# Altium PCB figo_pcb_v4.PcbDoc (part 1 of 2)
Units mil, origin at the board's own origin, x right, y up, seen from the top; angles counter-clockwise.
Board outline 3996.06 x 2756.8 mil, 2 copper layers (Top, Bottom); 57 components, 52 nets, 210 pads, 169 vias.
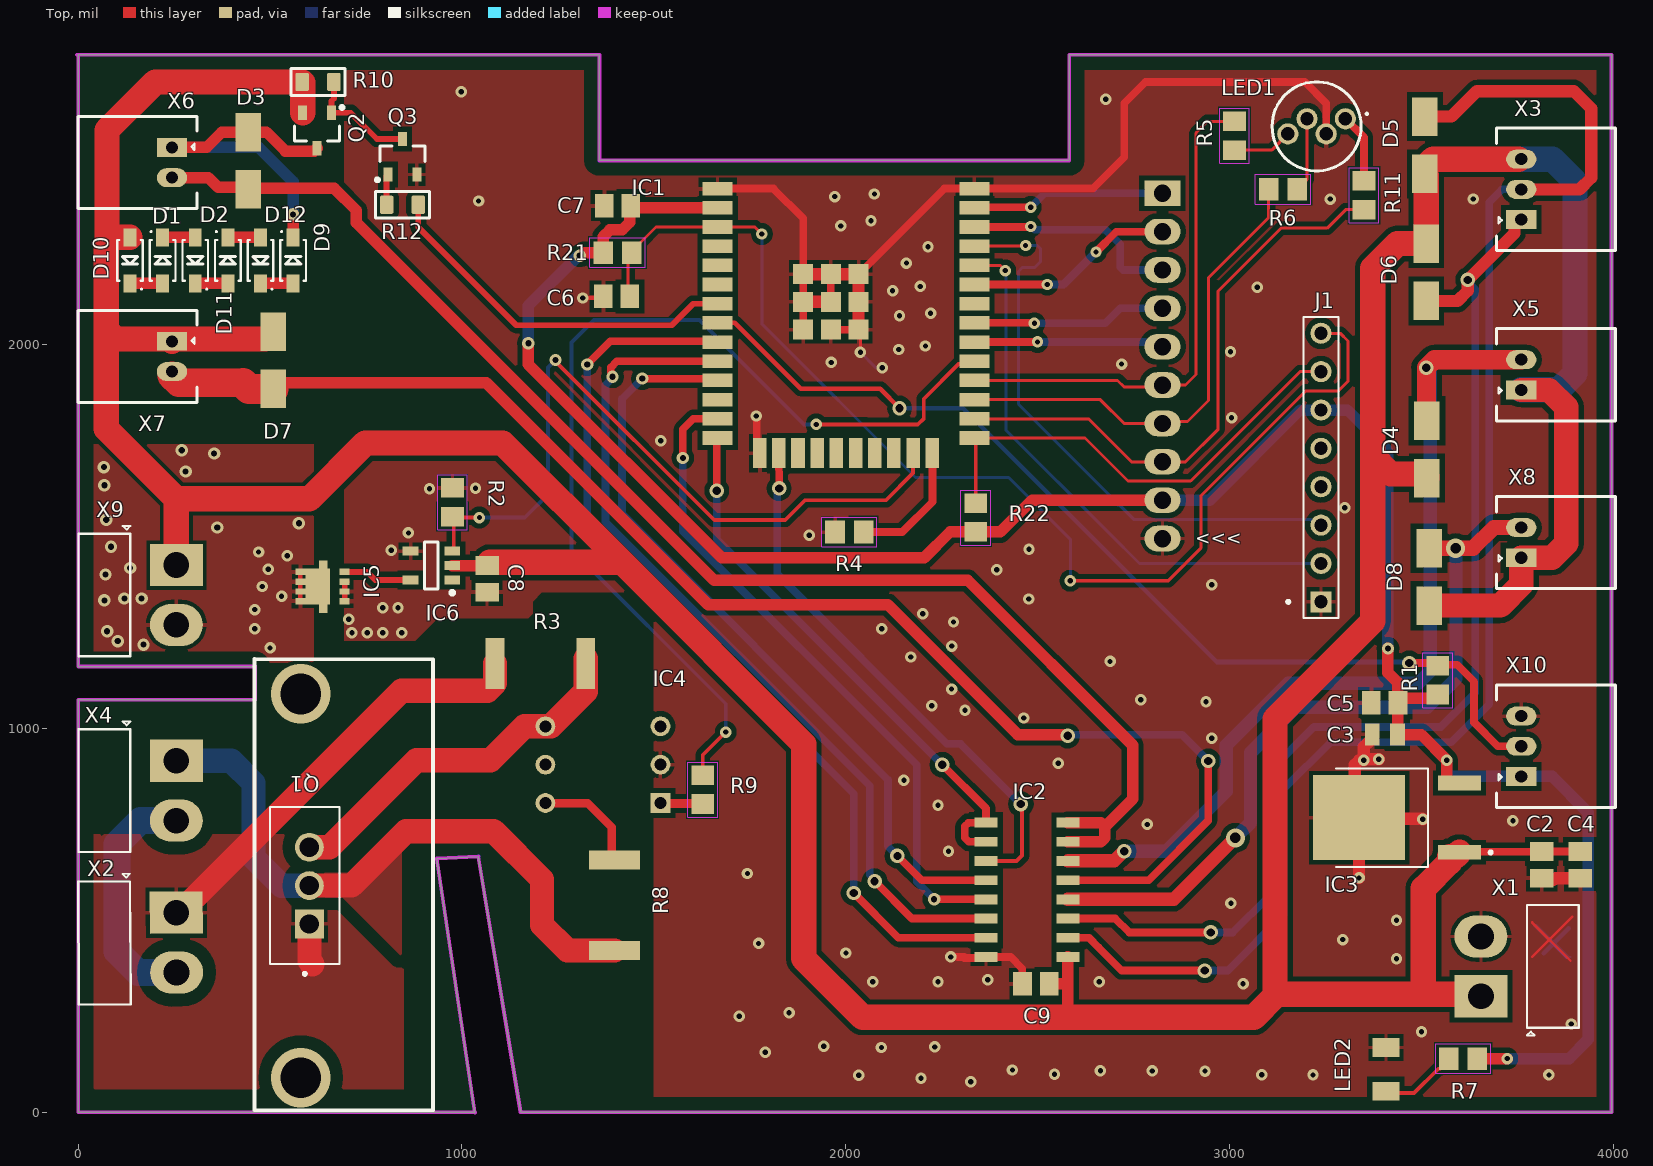
[diagram p0: Top view]
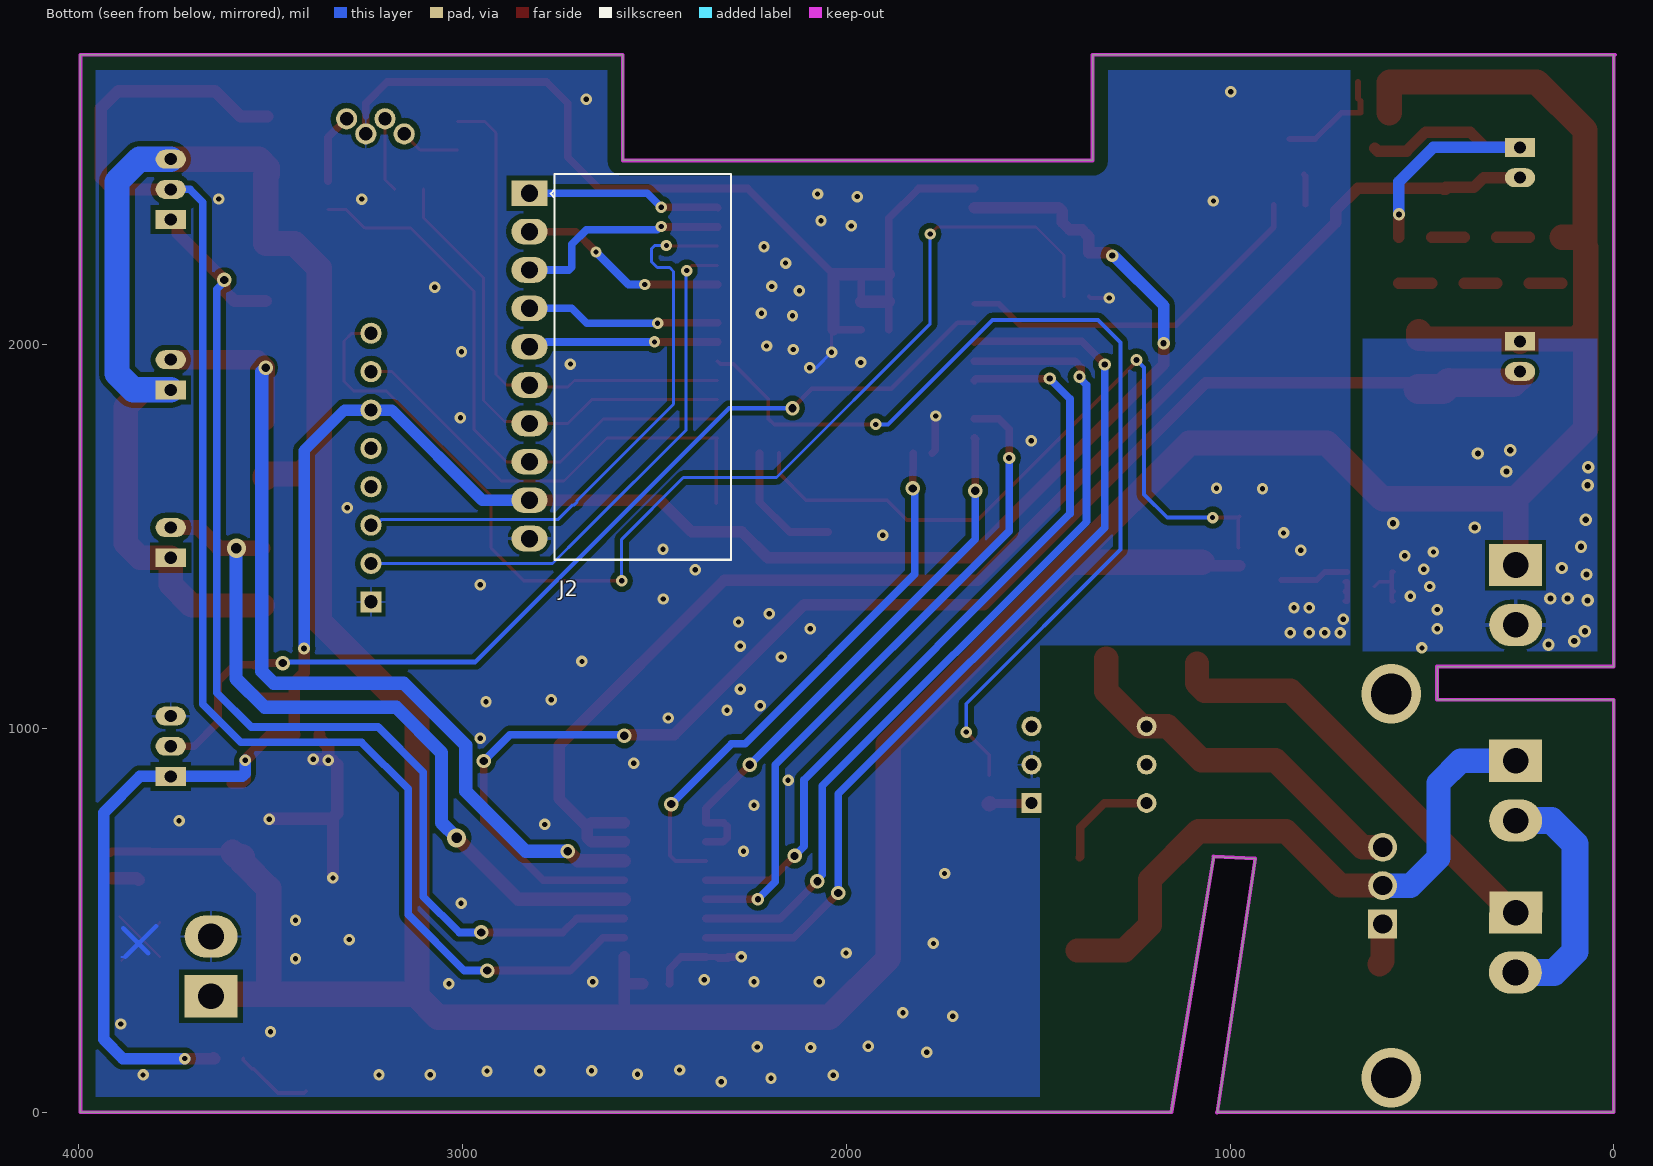
[diagram p1: Bottom view, seen from below]
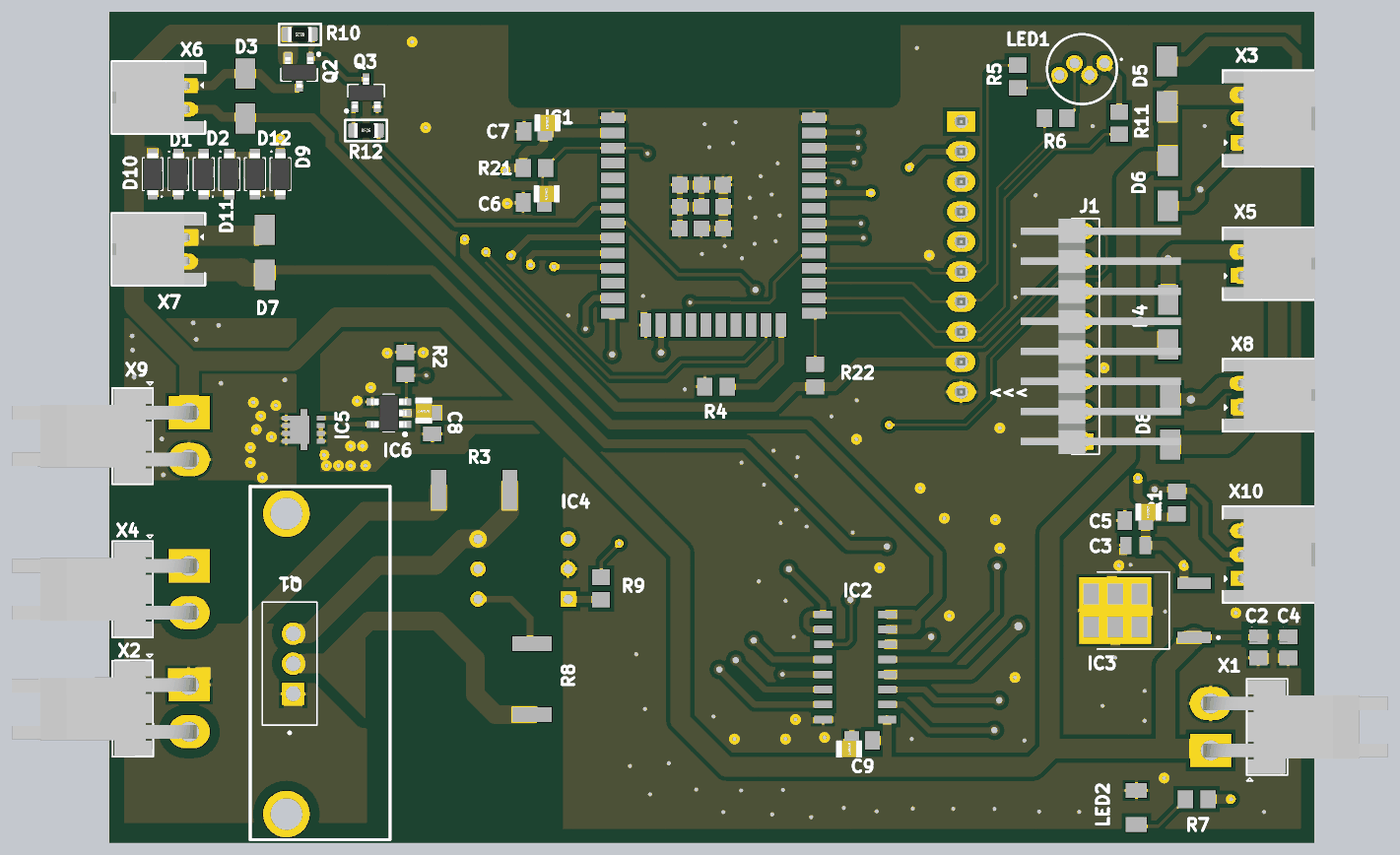
[diagram p2: 3D render of the assembled board from above, using the file's embedded part models]

## Layer stack, top to bottom
Top Solder: solder mask 0.4, Solder Resist, Dk 3.5
Top: signal copper 1.3778
Dielectric 1: dielectric 12.6, FR-4, Dk 4.8
Bottom: signal copper 1.3778
Bottom Solder: solder mask 0.4, Solder Resist, Dk 3.5

## Board outline
0,1074.8 460.63,1074.8 460.63,1161.42 0,1161.42 0,2755.91 1358.27,2755.91 1358.27,2480.31 2582.68,2480.31 2582.68,2755.91 3996.06,2755.91 3996.06,0 1153.54,0.01 1152.99,0.01 1042.81,666.25 934.58,660.93 1033.68,-0.89 1031.5,0 0,0

## Design rules (kind name [scope] priority, off if disabled: settings)
BoardOutlineClearance mdCopperDimension [All] p1: gap=10 ignorepadtopadclearanceinfootprint=FALSE except(0: Arc-SplitContinuation Track-SplitContinuation SMDPad-SplitContinuation THPad-SplitContinuation Via-SplitContinuation Fill-SplitContinuation Poly-SplitContinuation Region-SplitContinuation Text-SplitContinuation; 40: Poly-OutlineEdge Poly-CavityEdge Poly-CutoutEdge Poly-SplitBarrior)
Clearance Clearance_32 [InNamedPolygon('Top-NetQ1_1')] p1: gap=33 ignorepadtopadclearanceinfootprint=FALSE
Clearance Clearance_31 [InNamedPolygon('NETQ1_2_L01_P035')] p2: gap=10 ignorepadtopadclearanceinfootprint=FALSE except(0: Arc-Hole Track-Hole SMDPad-Hole THPad-Hole Via-Hole Fill-Hole Poly-Hole Region-Hole Text-Hole)
Clearance Clearance_30 [InNamedPolygon('Top-NetQ1_1')] p3: gap=22 ignorepadtopadclearanceinfootprint=FALSE
Clearance Clearance_29 [InNamedPolygon('Top-NetQ1_1')] p4: gap=25 ignorepadtopadclearanceinfootprint=FALSE
Clearance Clearance_28 [InNamedPolygon('Top-NetQ1_1')] p5: gap=10 ignorepadtopadclearanceinfootprint=FALSE except(0: Arc-Hole Track-Hole SMDPad-Hole THPad-Hole Via-Hole Fill-Hole Poly-Hole Region-Hole Text-Hole)
Clearance Clearance_27 [InNamedPolygon('Top-NetQ1_1')] p6: gap=10 ignorepadtopadclearanceinfootprint=FALSE except(0: Arc-Hole Track-Hole SMDPad-Hole THPad-Hole Via-Hole Fill-Hole Poly-Hole Region-Hole Text-Hole)
Clearance Clearance_26 [InNamedPolygon('NETQ1_2_L01_P021')] p7: gap=25 ignorepadtopadclearanceinfootprint=FALSE
Clearance Clearance_25 [InNamedPolygon('Bottom-NetQ1_1')] p8: gap=18 ignorepadtopadclearanceinfootprint=FALSE
Clearance Clearance_24 [InNamedPolygon('Bottom-NetQ1_1 1')] p9: gap=18 ignorepadtopadclearanceinfootprint=FALSE
Clearance Clearance_23 [InNamedPolygon('NETQ1_2_L01_P021')] p10: gap=18 ignorepadtopadclearanceinfootprint=FALSE
Clearance Clearance_22 [InNamedPolygon('Top-NetQ1_1')] p11: gap=18 ignorepadtopadclearanceinfootprint=FALSE
Clearance Clearance_21 [InNamedPolygon('Top-NetQ1_1')] p12: gap=590.55 ignorepadtopadclearanceinfootprint=FALSE
Clearance Clearance_20 [InNamedPolygon('NETQ1_1_L01_P023')] p13: gap=590.55 ignorepadtopadclearanceinfootprint=FALSE
Clearance Clearance_19 [InNamedPolygon('NETQ1_1_L01_P023')] p14: gap=10 ignorepadtopadclearanceinfootprint=FALSE except(0: Arc-Hole Track-Hole SMDPad-Hole THPad-Hole Via-Hole Fill-Hole Poly-Hole Region-Hole Text-Hole)
Clearance Clearance_18 [InNamedPolygon('Top-NetQ1_2')] p15: gap=25 ignorepadtopadclearanceinfootprint=FALSE
Clearance Clearance_17 [InNamedPolygon('Top-NetQ1_1')] p16: gap=25 ignorepadtopadclearanceinfootprint=FALSE
Clearance Clearance_16 [InNamedPolygon('Top-No Net')] p17: gap=10 ignorepadtopadclearanceinfootprint=FALSE except(0: Arc-Hole Track-Hole SMDPad-Hole THPad-Hole Via-Hole Fill-Hole Poly-Hole Region-Hole Text-Hole)
Clearance Clearance_15 [InNamedPolygon('Top-No Net')] p18: gap=10 ignorepadtopadclearanceinfootprint=FALSE except(0: Arc-Hole Track-Hole SMDPad-Hole THPad-Hole Via-Hole Fill-Hole Poly-Hole Region-Hole Text-Hole)
Clearance Clearance_14 [InNamedPolygon('Top-No Net')] p19: gap=30 ignorepadtopadclearanceinfootprint=FALSE
Clearance Clearance_13 [InNamedPolygon('Top-No Net')] p20: gap=25 ignorepadtopadclearanceinfootprint=FALSE
Clearance Clearance_12 [InNamedPolygon('Top-No Net')] p21: gap=25 ignorepadtopadclearanceinfootprint=FALSE
Clearance Clearance_11 [InNamedPolygon('Top-No Net')] p22: gap=25 ignorepadtopadclearanceinfootprint=FALSE
Clearance Clearance_10 [InNamedPolygon('Top-No Net')] p23: gap=10 ignorepadtopadclearanceinfootprint=FALSE except(0: Arc-Hole Track-Hole SMDPad-Hole THPad-Hole Via-Hole Fill-Hole Poly-Hole Region-Hole Text-Hole)
Clearance Clearance_9 [InNamedPolygon('Top-NetQ1_1')] p24: gap=10 ignorepadtopadclearanceinfootprint=FALSE except(0: Arc-Hole Track-Hole SMDPad-Hole THPad-Hole Via-Hole Fill-Hole Poly-Hole Region-Hole Text-Hole)
Clearance Clearance_8 [InNamedPolygon('Polygon_1_Net_GND')] p25: gap=14 ignorepadtopadclearanceinfootprint=FALSE
Clearance Clearance_7 [InNamedPolygon('Polygon_2_Net_GND')] p26: gap=14 ignorepadtopadclearanceinfootprint=FALSE
Clearance Clearance_6 [InNamedPolygon('Top-NetD2_2')] p27: gap=12 ignorepadtopadclearanceinfootprint=FALSE
Clearance Clearance_5 [InNamedPolygon('Top-NetQ1_2')] p28: gap=25 ignorepadtopadclearanceinfootprint=FALSE
Clearance Clearance_4 [InNamedPolygon('Top-NetQ1_2')] p29: gap=25 ignorepadtopadclearanceinfootprint=FALSE
Clearance Clearance_3 [InNamedPolygon('Top-NetQ1_1')] p30: gap=25 ignorepadtopadclearanceinfootprint=FALSE
Clearance Clearance_2 [InNamedPolygon('Top-NetQ1_1')] p31: gap=10 ignorepadtopadclearanceinfootprint=FALSE except(0: Arc-Hole Track-Hole SMDPad-Hole THPad-Hole Via-Hole Fill-Hole Poly-Hole Region-Hole Text-Hole)
Clearance Clearance_1 [InNamedPolygon('Top-NetQ1_1')] p32: gap=10 ignorepadtopadclearanceinfootprint=FALSE except(0: Arc-Hole Track-Hole SMDPad-Hole THPad-Hole Via-Hole Fill-Hole Poly-Hole Region-Hole Text-Hole)
Clearance "Clearance (Same Net)" [All] p33: gap=6 ignorepadtopadclearanceinfootprint=TRUE
Clearance [All] p34: gap=6 ignorepadtopadclearanceinfootprint=FALSE except(12: Arc-Poly Track-Poly SMDPad-Poly THPad-Poly Via-Poly Fill-Poly Poly-Poly Poly-Region Poly-Text; 40: Poly-Hole)
HoleSize [All] p1: absolutevalues=TRUE maxlimit=100000 minlimit=13.78 maxpercent=80.000 minpercent=20.000
HoleToHoleClearance mdDrill [All] p1: gap=6 allowstackedmicrovias=TRUE
PasteMaskExpansion mlMinCreamFrame [All] p1: expansion=0
PolygonConnect PolygonConnect_9 [All vs IsNamedPolygon('Bottom-NetQ1_1 1')] p1: connectstyle=Relief reliefconductorwidth=10 reliefentries=4 polygonreliefangle="90 Angle" airgapwidth=10
PolygonConnect PolygonConnect_8 [All vs IsNamedPolygon('Bottom-NetQ1_1')] p2: connectstyle=Relief reliefconductorwidth=10 reliefentries=4 polygonreliefangle="90 Angle" airgapwidth=10
PolygonConnect PolygonConnect_7 [All vs IsNamedPolygon('Top-NetQ1_1')] p3: connectstyle=Relief reliefconductorwidth=10 reliefentries=4 polygonreliefangle="90 Angle" airgapwidth=10
PolygonConnect PolygonConnect_6 [All vs IsNamedPolygon('Top-NetD2_2')] p4: thpad.connectstyle=Relief thpad.reliefconductorwidth=10 thpad.reliefentries=4 thpad.polygonreliefangle="90 Angle" thpad.airgapwidth=10 smdpad.connectstyle=Relief smdpad.reliefconductorwidth=10 smdpad.reliefentries=4 smdpad.polygonreliefangle="90 Angle" smdpad.airgapwidth=10 via.connectstyle=Direct via.reliefconductorwidth=10 via.reliefentries=4 via.polygonreliefangle="90 Angle" via.airgapwidth=10
PolygonConnect PolygonConnect_5 [All vs IsNamedPolygon('Top-NetQ1_2')] p5: thpad.connectstyle=Relief thpad.reliefconductorwidth=10 thpad.reliefentries=4 thpad.polygonreliefangle="90 Angle" thpad.airgapwidth=10 smdpad.connectstyle=Direct smdpad.reliefconductorwidth=10 smdpad.reliefentries=4 smdpad.polygonreliefangle="90 Angle" smdpad.airgapwidth=10 via.connectstyle=Direct via.reliefconductorwidth=10 via.reliefentries=4 via.polygonreliefangle="90 Angle" via.airgapwidth=10
PolygonConnect PolygonConnect_4 [All vs IsNamedPolygon('Top-NetQ1_2')] p6: thpad.connectstyle=Relief thpad.reliefconductorwidth=10 thpad.reliefentries=4 thpad.polygonreliefangle="90 Angle" thpad.airgapwidth=10 smdpad.connectstyle=Direct smdpad.reliefconductorwidth=10 smdpad.reliefentries=4 smdpad.polygonreliefangle="90 Angle" smdpad.airgapwidth=10 via.connectstyle=Relief via.reliefconductorwidth=10 via.reliefentries=4 via.polygonreliefangle="90 Angle" via.airgapwidth=10
PolygonConnect PolygonConnect_3 [All vs IsNamedPolygon('Top-NetQ1_2')] p7: thpad.connectstyle=Relief thpad.reliefconductorwidth=10 thpad.reliefentries=4 thpad.polygonreliefangle="90 Angle" thpad.airgapwidth=10 smdpad.connectstyle=Relief smdpad.reliefconductorwidth=10 smdpad.reliefentries=4 smdpad.polygonreliefangle="90 Angle" smdpad.airgapwidth=10 via.connectstyle=Direct via.reliefconductorwidth=10 via.reliefentries=4 via.polygonreliefangle="90 Angle" via.airgapwidth=10
PolygonConnect PolygonConnect_2 [All vs IsNamedPolygon('Top-NetQ1_2')] p8: thpad.connectstyle=Relief thpad.reliefconductorwidth=10 thpad.reliefentries=4 thpad.polygonreliefangle="90 Angle" thpad.airgapwidth=10 smdpad.connectstyle=Direct smdpad.reliefconductorwidth=10 smdpad.reliefentries=4 smdpad.polygonreliefangle="90 Angle" smdpad.airgapwidth=10 via.connectstyle=Direct via.reliefconductorwidth=10 via.reliefentries=4 via.polygonreliefangle="90 Angle" via.airgapwidth=10
PolygonConnect PolygonConnect_1 [All vs IsNamedPolygon('Top-NetD2_2')] p9: thpad.connectstyle=Relief thpad.reliefconductorwidth=10 thpad.reliefentries=4 thpad.polygonreliefangle="90 Angle" thpad.airgapwidth=10 smdpad.connectstyle=Direct smdpad.reliefconductorwidth=10 smdpad.reliefentries=4 smdpad.polygonreliefangle="90 Angle" smdpad.airgapwidth=10 via.connectstyle=Direct via.reliefconductorwidth=10 via.reliefentries=4 via.polygonreliefangle="90 Angle" via.airgapwidth=10
PolygonConnect PolygonConnect_For_PolygonThermal_ON_Width60000_Gap100000 [InPolygonClass('PolygonThermal_ON_Width60000_Gap100000') vs Not IsVia] p10: connectstyle=Relief reliefconductorwidth=6 reliefentries=4 polygonreliefangle="90 Angle" airgapwidth=10
PolygonConnect ThermalVias [IsVia] p11: connectstyle=Direct reliefconductorwidth=10 reliefentries=4 polygonreliefangle="90 Angle" airgapwidth=10
PolygonConnect [All] p12: connectstyle=Relief reliefconductorwidth=10 reliefentries=4 polygonreliefangle="90 Angle" airgapwidth=10
RoutingVias [All] p1: holewidth=13.78 width=29.78 viastyle="Through Hole" minholewidth=13.78 minwidth=29.78 maxholewidth=100 maxwidth=100
SolderMaskExpansion [All] p1: expansion=3 istentingtop=FALSE
SolderMaskExpansion mlMinStopFrame [All] p2: expansion=4 istentingtop=FALSE
Width [All] p1: maxlimit=10000 minlimit=6 preferedwidth=6
27 further rules are at their usual default settings.

## Classes and differential pairs
polygon class PolygonThermal_ON_Width60000_Gap100000: Polygon_1_Net_GND
polygon class Isolate_12: Polygon_1_Net_GND

## Components (designator, comment, footprint, x,y, rotation, side; value= is the part's Value field where it differs from the comment)
C2 "C0805C104K3RACAUTO" CAPC2012X88N 3814.11,644.75 r90 top
C3 "GRM21BR60J107ME15L" CAPC2012X145N 3405.51,984.25 r180 top
C4 "C0805C104K3RACAUTO" CAPC2012X88N 3914.11,644.75 r90 top
C5 "C0805C104K3RACAUTO" CAPC2012X88N 3404.92,1066.93 r0 top
C6 "C0805C104K3RACAUTO" CAPC2012X88N 1402.87,2125.98 r0 top
C7 "C0805C104K3RACAUTO" CAPC2012X88N 1405.51,2362.2 r0 top
C8 "C0805C104K3RACAUTO" CAPC2012X88N 1065.55,1389.69 r90 top
C9 "C0805C104K3RACAUTO" CAPC2012X88N 2495.75,335 r180 top
D1 "Diode" SOD-123F 220,2220 r90 top
D2 "Diode" SOD-123F 305,2220 r270 top
D3 "FM4004-W" DIONM5025X231N 443.36,2479.75 r270 top
D4 "FM4004-W" DIONM5025X231N 3514.62,1727.47 r90 top
D5 "FM4004-W" DIONM5025X231N 3509.6,2520.12 r90 top
D6 "FM4004-W" DIONM5025X231N 3513.28,2188.98 r270 top
D7 "FM4004-W" DIONM5025X231N 508.36,1959.75 r270 top
D8 "FM4004-W" DIONM5025X231N 3520.75,1395 r90 top
D9 "Diode" SOD-123F 560,2220 r90 top
D10 "Diode" SOD-123F 135,2220 r270 top
D11 "Diode" SOD-123F 390,2220 r90 top
D12 "Diode" SOD-123F 475,2220 r270 top
IC1 "ESP32-WROOM-32E(M113EH6400PH3Q0)" ESP32WROOM32D4MB 1666.29,2406.72 r0 top
IC2 "TBD62003AFWG,EL" SOIC127P600X175-16N 2472.62,579.64 r0 top
IC3 "UA78M33CKVURG3" TO229P990X252-3N 3437.01,767.72 r180 top
IC4 "MOC3083" DIP762W60P254L750H600Q6N 1367.52,905.75 r180 top
IC5 "NTTFS4939NTAG" DFN330X330X75-8N 636.77,1369.81 r180 top
IC6 "MCP1416T-E/OT" SOT23-5 920.55,1424.69 r180 top
J1 "102976-8" TE_102976-8 3238.87,1680.03 r90 top
J2 "HDR 1X10" "TH,POS-10S, R/A LOCK, 2.54mm" 2825.75,1945 r270 bottom locked
LED1 "WP154A4SUREQBFZGC" L-154A4SUREQBFZGEC 3227.42,2569.32 r90 top
LED2 "599-0210-007F" LEDC3216X90N 3408.17,111.76 r270 top
Q1 "‎BT138-600E,127‎" TO254P1040X460X1975-3 602.36,490.55 r90 top
Q2 "MOSFET-P_D" SOT23 622.4,2558.74 r270 top
Q3 "NPN" SOT23 845,2490 r90 top
R1 "ERJ-6RBD1652V" RESC2012X70 3543.31,1125.98 r90 top
R2 "ERJ-6RBD1652V" RESC2012X70 975.55,1589.69 r270 top
R3 "CRCW2512360RJNEG" RESC6332X70N 1204.72,1169.29 r0 top
R4 "ERJ-6RBD1652V" RESC2012X70 2009.58,1512.19 r180 top
R5 "ERJ-6RBD1652V" RESC2012X70 3013.4,2544.79 r90 top
R6 "ERJ-6RBD1652V" RESC2012X70 3139.82,2405.3 r180 top
R7 "ERJ-6RBD1652V" RESC2012X70 3609.11,139.75 r0 top
R8 "CRCW2512360RJNEG" RESC6332X70N 1397.64,539.37 r90 top
R9 "ERJ-6RBD1652V" RESC2012X70 1627.52,840.75 r90 top
R10 "" R0805 625,2685 r180 top
R11 "ERJ-6RBD1652V" RESC2012X70 3350.96,2389.67 r90 top
R12 "" R0805 845,2365 r0 top
R21 "ERJ-6RBD1652V" RESC2012X70 1405.51,2240.16 r180 top
R22 "ERJ-6RBD1652V" RESC2012X70 2339.11,1549.75 r270 top
X1 "8-1744056-2" "TE-ECOPWR-2S R/A, 3.96mm" 3655.75,380 r90 top
X2 "8-1744056-2" "TE-ECOPWR-2S R/A, 3.96mm" 255.91,442.05 r270.3 top
X3 "440055-3" "TE-HPI-3P TH R/A 2.0mm" 3760.75,2405 r90 top
X4 "8-1744056-2" "TE-ECOPWR-2S R/A, 3.96mm" 255.91,837.95 r270 top
X5 "440055-2" "TE-HPI-2P TH R/A 2.0mm" 3760.75,1921.88 r90 top
X6 "440055-2" "TE-HPI-2P TH R/A 2.0mm" 244.34,2475 r270 top
X7 "440055-2" "TE-HPI-2P TH R/A 2.0mm" 244.34,1969.75 r270 top
X8 "440055-2" "TE-HPI-2P TH R/A 2.0mm" 3760.75,1484.37 r90 top
X9 "8-1744056-2" "TE-ECOPWR-2S R/A, 3.96mm" 255.91,1347.95 r270 top
X10 "440055-3" "TE-HPI-3P TH R/A 2.0mm" 3760.75,953.74 r90 top

## Footprints (in the part's own frame and the unit in brackets; to place one, negate y for a bottom-side part, rotate by r counter-clockwise, add the part's x,y. Pads: shape width x height; smd on the part's side, far side on the other; paste and mask are expansions set on the pad)
CAPC2012X88N [mm]
  rect 1.24x1.56 smd: 1(-0.885,0) 2(0.885,0)
  body extent 0,0 2.2,1.45, height 1
CAPC2012X145N [mil] "CAPC2012X145N"
  rect 38.19x57.87 smd: 1(-32.68,0) 2(32.68,0)
DFN330X330X75-8N [mm]
  rect 0.66x0.42 smd: 1(-1.468,0.976) 2(-1.468,0.326) 3(-1.468,-0.324) 4(-1.468,-0.974) 5(1.469,-0.973) 6(1.469,-0.323) 7(1.469,0.327) 8(1.469,0.977)
  rect 1.64x2.37 smd: D(0.318,0.001)
  rect 0.57x3.46 smd: D.(-0.04,0.001)
DIONM5025X231N [mil] "DIONM5025X231N"
  rect 100.39x66.93 smd: 1(-74.8,0) 2(74.8,0)
DIP762W60P254L750H600Q6N [mil] "DIP762W60P254L750H600Q6N"
  rect 51.5x51.5 / inner rect 60x60 / far side rect 51.5x51.5 hole 31.5: 1(-150,100)
  round 51.5 / inner round 60 / far side round 51.5 hole 31.5: 2(-150,0) 3(-150,-100) 4(150,-100) 5(150,0) 6(150,100)
ESP32WROOM32D4MB [mm] "ESP32WROOM32D4MB"
  rect 2x0.9 smd: 1(0,0.01) 2(0,-1.26) 3(0,-2.53) 4(0,-3.8) 5(0,-5.07) 6(0,-6.34) 7(0,-7.61) 8(0,-8.88) 9(0,-10.15) 10(0,-11.42) 11(0,-12.69) 12(0,-13.96) 13(0,-15.23) 14(0,-16.5) 25(17,-16.5) 26(17,-15.23) 27(17,-13.96) 28(17,-12.69) 29(17,-11.42) 30(17,-10.15) 31(17,-8.88) 32(17,-7.61) 33(17,-6.34) 34(17,-5.07) 35(17,-3.8) 36(17,-2.53) 37(17,-1.26) 38(17,0.01)
  rect 0.9x2 smd: 15(2.785,-17.5) 16(4.055,-17.5) 17(5.325,-17.5) 18(6.595,-17.5) 19(7.865,-17.5) 20(9.135,-17.5) 21(10.405,-17.5) 22(11.675,-17.5) 23(12.945,-17.5) 24(14.215,-17.5)
  rect 1.33x1.33 smd: 39(5.665,-5.655) 40(5.665,-7.49) 41(5.665,-9.325) 42(7.5,-9.325) 43(9.335,-9.325) 44(9.335,-7.49) 45(9.335,-5.655) 46(7.5,-5.655) 47(7.5,-7.49)
L-154A4SUREQBFZGEC [mil] "L-154A4SUREQBFZGEC"
  round 55.12 / inner round 60 / far side round 55.12 hole 35: 1(19.69,-75) 2(-19.69,-25) 3(19.69,25) 4(-19.69,75)
  silkscreen extent -116,-132 116,116
LEDC3216X90N [mil] "LEDC3216X90N"
  rect 49.21x70.87 smd: 1(-57.09,0) 2(57.09,0)
R0805 [mm] "Chip Resistor, 2-Leads, Body 2.00x1.25mm, IPC High Density-RESC2012X08L"
  rrect25% 0.9x1.2 smd: 1(-1.05,0) 2(1.05,0)
  silkscreen extent -1.78,-0.89 1.78,0.89, body extent -1,-0.62 1,0.63, height 0.5
RESC2012X70 [mil] "RESC2012X70"
  rect 51.18x59.06 smd: 1(-37.4,0) 2(37.4,0)
  Top keep-out lines w2: -71.77,38.7 71.77,38.7 71.77,-38.7 -71.77,-38.7 -71.77,38.7
RESC6332X70N [mm] "RESC6332X70N"
  rect 1.25x3.35 smd: 1(-3,0) 2(3,0)
SOD-123F [mm] "SODFL, 2-Leads, Body 1.60x3.50mm, IPC Medium Density"
  rect 1.2x0.85 smd: 1(-1.525,0) 2(1.525,0)
  silkscreen extent -1.35,-0.85 1.95,0.85, body extent -1.75,-0.85 1.75,0.85, height 0.81
SOIC127P600X175-16N [mm] "SOIC127P600X175-16N"
  rect 1.525x0.65 smd: 1(-2.712,4.445) 2(-2.712,3.175) 3(-2.712,1.905) 4(-2.712,0.635) 5(-2.712,-0.635) 6(-2.712,-1.905) 7(-2.712,-3.175) 8(-2.712,-4.445) 9(2.712,-4.445) 10(2.712,-3.175) 11(2.712,-1.905) 12(2.712,-0.635) 13(2.712,0.635) 14(2.712,1.905) 15(2.712,3.175) 16(2.712,4.445)
SOT23 [mm] "SOT95P235X110-3N, 3-Leads, Body 2.90x2.35mm, Pitch 0.95mm, IPC Medium Density"
  rect 0.95x0.6 smd: 1(-1.175,0.95) 2(-1.175,-0.95) 3(1.175,0)
  silkscreen extent -1.62,-1.5 0.7,1.75, body extent -1.3,-1.5 1.3,1.5, height 1.1
SOT23-5 [mm] "5-Leads, Body 2.96x2.82mm, Pitch 0.95mm, IPC Medium Density, SOT95P282X145-5N"
  rect 1.05x0.6 smd mask+0.05: 1(-1.375,0.95) 2(-1.375,0) 3(-1.375,-0.95) 4(1.375,-0.95) 5(1.375,0.95)
  silkscreen extent -1.5,-1.55 0.45,1.92, body extent -1.5,-1.55 1.5,1.55, height 1.45
"TE-ECOPWR-2S R/A, 3.96mm" [mm] "2 Positions Header, 3.96mm Through Hole Right Angle, P/N: 8-1744056-2"
  rect 2.8x3.5 hole 1.7: 1(-1.98,0)
  oval 2.8x3.5 hole 1.7: 2(1.98,0)
  silkscreen extent -4.57,-6.48 4.06,-3.05, body extent -3.96,-14.95 3.96,0.62, height 8.77
"TE-HPI-2P TH R/A 2.0mm" [mm] "P/N: 440055-2, Housing P/N: 440129-2, 2-440129-2"
  rect 1.25x2 hole 0.8: 1(-1,0)
  oval 1.25x2 hole 0.8: 2(1,0)
  silkscreen extent -3.05,-6.22 3.05,1.65, body extent -3,-6.18 3,1.52, height 4.96
"TE-HPI-3P TH R/A 2.0mm" [mm] "P/N: 440055-3, Housing P/N: 440129-3, 2-440129-3"
  rect 1.25x2 hole 0.8: 1(-2,0)
  oval 1.25x2 hole 0.8: 2(0,0) 3(2,0)
  silkscreen extent -4.05,-6.22 4.06,1.65, body extent -4,-6.18 4,1.52, height 4.96
TE_102976-8 [mm]
  rect 1.398x1.398 hole 0.89: 1(-8.89,0)
  round 1.398 hole 0.89: 2(-6.35,0) 3(-3.81,0) 4(-1.27,0) 5(1.27,0) 6(3.81,0) 7(6.35,0) 8(8.89,0)
  silkscreen extent -9.96,-1.17 9.96,2.27, body extent -9.96,-8.08 9.96,5.46, height 1.17
"TH,POS-10S, R/A LOCK, 2.54mm" [mm] "10 Positions R/A Friction lock Header, 2.54mm Through Hole, P/N: LHA-10-TRB"
  rect 1.7x2.4 hole 1.15: 1(-11.43,0)
  oval 1.7x2.4 hole 1.15: 2(-8.89,0) 3(-6.35,0) 4(-3.81,0) 5(-1.27,0) 6(1.27,0) 7(3.81,0) 8(6.35,0) 9(8.89,0) 10(11.43,0)
  silkscreen extent -12.7,1.4 12.83,13.34, body extent -12.7,-0.32 12.7,13.25, height 5.81
TO229P990X252-3N [mm]
  rect 2.83x0.97 smd: 1(-4.14,2.29) 3(-4.14,-2.29)
  rect 6.1x5.63 smd paste-4: 4(2.51,0)
  silkscreen extent -6.3,-3.26 4.04,3.26
TO254P1040X460X1975-3 [mm]
  rect 1.91x1.91 hole 1.27: 1(0,0)
  round 1.91 hole 1.27: 2(2.54,0) 3(5.08,0)
  silkscreen extent -3.4,-2 7.74,2.6

## Part data
C2 C4 C5 C6 C7 C8 C9: "0.1ÂµF Â±10% 25V Ceramic Capacitor X7R 0805 (2012 Metric)", Package="0805 KEMET", Availability=Good, Check_prices=https://www.snapeda.com/parts/C0805C104K3RACAUTO/KEMET/view-part/1798222/?ref=eda, MF=KEMET, MP=C0805C104K3RACAUTO, Price=None, Purchase-URL=https://pricing.snapeda.com/search/part/C0805C104K3RACAUTO/?ref=eda, SnapEDA_Link=https://www.snapeda.com/parts/C0805C104K3RACAUTO/KEMET/view-part/1798222/?ref=snap
C3: "Multilayer Ceramic Capacitors MLCC - SMD/SMT 100UF   6.3V   20%        0805   Source:  Datasheet", MANUFACTURER_NAME="Murata Electronics", DeviceSetName=GRM21BR60J107ME15L, GateName_1=G$1, Height=1.45mm, LibraryName=GRM21BR60J107ME15L, Manufacturer_Part_Number=GRM21BR60J107ME15L, MOUSER_PART_NUMBER=81-GRM21BR60J107ME5L, MOUSER_PRICE-STOCK=https://www.mouser.co.uk/ProductDetail/Murata-Electronics/GRM21BR60J107ME15L?qs=qSv5qXjCIG0V4cgMTBuIkA%3D%3D, SymbolName_1=GRM21BR60J107ME15L
D1 D2 D9 D10 D11 D12: Forward Current=1A, Manufacturer="Pan Jit", Manufacturer Part Number=GS1001FL_R1_00001, Max Operating Temperature=150°C, Max Repetitive Reverse Voltage (Vrrm)=100V, Max Reverse Current=1uA, Min Operating Temperature=-50°C, Peak Non-Repetitive Surge Current=16.5A, Supplier Part Number 1=3757-GS1001FL_R1_00001CT-ND, Category="Rectifier Diodes", ComponentLink1Description=http://www.panjit.com/upload/product/18/GS1000FL_SERIES.pdf?src-supplier=Avnet, ComponentLink1URL=http://www.panjit.com/upload/product/18/GS1000FL_SERIES.pdf?src-supplier=Avnet, Mounting Technology="Surface Mount", Pricing 1="1=0.24, 10=0.199, 100=0.1057, 500=0.06952, 1000=0.04728 (USD)", RoHS=Yes, RoHS Compliant=Yes, Stock 1=10971, Supplier 1=Digi-Key
D3 D4 D5 D6 D7 D8: "Rectifiers 1N4004 1A 400V   Source:  Datasheet", MANUFACTURER_NAME=Rectron, DeviceSetName=FM4004-W, GateName_1=G$1, Height=2.31mm, LibraryName=FM4004-W, Manufacturer_Part_Number=FM4004-W, MOUSER_PART_NUMBER=583-FM4004, MOUSER_PRICE-STOCK=https://www.mouser.co.uk/ProductDetail/Rectron/FM4004-W?qs=Iw9Ubr57Px3IHNH1bE4l9w%3D%3D, SymbolName_1=FM4004-W
IC1: library part ESP32-WROOM-32D__4MB_, "WiFi Modules (802.11) SMD Module, ESP32-D0WD, 32Mbits SPI flash, UART mode, PCB antenna   Source:  Datasheet", MANUFACTURER_NAME="Espressif Systems", Manufacturer_Part_Number="ESP32-WROOM-32D (4MB)", DeviceSetName=ESP32-WROOM-32D__4MB_, GateName_1=G$1, Height=3.2mm, LibraryName=ESP32-WROOM-32D__4MB_, MOUSER_PART_NUMBER=356-ESP32WROOM-32D, MOUSER_PRICE-STOCK=https://www.mouser.co.uk/ProductDetail/Espressif-Systems/ESP32-WROOM-32D-4MB?qs=GBLSl2AkirvkALo4fyKM5Q%3D%3D, SymbolName_1=ESP32-WROOM-32D__4MB_
IC2: library part ULN2003ADR, "Trans Darlington NPN 50V 0.5A SOIC16 Texas Instruments ULN2003ADR, 7-element NPN Darlington Transistor Array, 0.5 A 50 V, 16-Pin SOIC   Source:  Datasheet", MANUFACTURER_NAME="Texas Instruments", DeviceSetName=ULN2003ADR, GateName_1=G$1, Height=1.75mm, LibraryName=ULN2003ADR, Manufacturer_Part_Number=ULN2003ADR, MOUSER_PART_NUMBER=595-ULN2003ADR, MOUSER_PRICE-STOCK=https://www.mouser.co.uk/ProductDetail/Texas-Instruments/ULN2003ADR?qs=D5pVkbrsqqI8WxXD0eSvDA%3D%3D, SymbolName_1=ULN2003ADR
IC3: Package=None, Availability=Unavailable, MP=UA78M33CKVURG3, Price=None
IC4: "Triac & SCR Output Optocouplers 800VDRM IFT=5mA 6 Pin Optocoupler   Source:  Datasheet", MANUFACTURER_NAME=Lite-On, DeviceSetName=MOC3083, GateName_1=G$1, Height=6mm, LibraryName=MOC3083, Manufacturer_Part_Number=MOC3083, MOUSER_PART_NUMBER=859-MOC3083, MOUSER_PRICE-STOCK=https://www.mouser.co.uk/ProductDetail/Lite-On/MOC3083?qs=2BArZ0I3Qlm%252BsCXQP3OOeA%3D%3D, SymbolName_1=MOC3083
IC5: "Power MOSFET 30V 56A 5.5 mOhm Single N-Channel u8FL", Package=None, Availability=Unavailable, MP=NTTFS4939NTAG, Price=None
IC6: "1.5A, High Speed Power MOSFET Driver Non Inverting", Manufacturer=Microchip, Max Operating Temperature=125°C, Min Operating Temperature=-40°C, Output Peak Current Limit-Nom=1.5A, Package Body Material=Plastic, Package Code=LSSOP, Package Equivalence Code=TSOP5/6,.11,37, Package Shape=Rectangular, Package Style="SMALL OUTLINEMeter", Peak Reflow Temperature (Cel)=260°C, Power Supplies=4.5/18V, Supplier Part Number 1=MCP1416T-E/OTCT-ND, Temperature Grade=AUTOMOTIVE, Time @ Peak Reflow Temperature-Max (s)=40s, Category="Gate Drivers", ComponentLink1Description=https://datasheet.ciiva.com:443/pdfs/VipMasterIC/IC/MCHP/MCHPS05696/MCHPS05696-1.pdf?src-supplier=IHS+Markit, ComponentLink1URL=https://datasheet.ciiva.com:443/pdfs/VipMasterIC/IC/MCHP/MCHPS05696/MCHPS05696-1.pdf?src-supplier=IHS+Markit, ComponentLink2Description=https://datasheet.ciiva.com/3228/22092d-mcp1415-3228496.pdf?src-supplier=Avnet, ComponentLink2URL=https://datasheet.ciiva.com/3228/22092d-mcp1415-3228496.pdf?src-supplier=Avnet, ComponentLink3Description=https://datasheet.ciiva.com/23952/1669445-23952041.pdf?src-supplier=Newark, ComponentLink3URL=https://datasheet.ciiva.com/23952/1669445-23952041.pdf?src-supplier=Newark, ComponentLink4Description=https://datasheet.ciiva.com/1500/1669445-1500307.pdf?src-supplier=Element14, ComponentLink4URL=https://datasheet.ciiva.com/1500/1669445-1500307.pdf?src-supplier=Element14, ComponentLink5Description=https://datasheet.ciiva.com/22694/1669445-22694330.pdf?src-supplier=Element14, ComponentLink5URL=https://datasheet.ciiva.com/22694/1669445-22694330.pdf?src-supplier=Element14, ComponentLink6Description=https://datasheet.ciiva.com/3226/22092d-mcp1415-3226504.pdf?src-supplier=Avnet, ComponentLink6URL=https://datasheet.ciiva.com/3226/22092d-mcp1415-3226504.pdf?src-supplier=Avnet, ComponentLink7Description=https://datasheet.ciiva.com/1954/22092e-1954917.pdf?src-supplier=Digi-Key, ComponentLink7URL=https://datasheet.ciiva.com/1954/22092e-1954917.pdf?src-supplier=Digi-Key, ComponentLink8Description=https://datasheet.ciiva.com/1954/22092e-1954918.pdf?src-supplier=Digi-Key, ComponentLink8URL=https://datasheet.ciiva.com/1954/22092e-1954918.pdf?src-supplier=Digi-Key, ComponentLink9Description=https://datasheet.ciiva.com/1954/22092e-1954916.pdf?src-supplier=Digi-Key, ComponentLink9URL=https://datasheet.ciiva.com/1954/22092e-1954916.pdf?src-supplier=Digi-Key, ComponentLink10Description=https://datasheet.ciiva.com/29305/651398-da-01-en-ic-mosfet-drv-mcp1416t-e-ot-sot-23-5-mcp-29305420.pdf?src-supplier=Conrad, ComponentLink10URL=https://datasheet.ciiva.com/29305/651398-da-01-en-ic-mosfet-drv-mcp1416t-e-ot-sot-23-5-mcp-29305420.pdf?src-supplier=Conrad, Height - Seated (Max)=1.45mm, High Side Driver=No, Interface IC Type="BUFFER OR INVERTER BASED MOSFET DRIVER", JESD-30 Code=R-PDSO-G5, JESD-609 Code=e3, Length=2.9mm, Manufacturer Part Number=MCP1416T-E/OT, Moisture Sensitivity Level=1, Number of Functions=1, Number of Pins=5, Pricing 1="1=0.80000, 25=0.69000 (USD)", Qualification Status="Not Qualified", REACH SVHC=Yes, RoHS=Yes, RoHS Compliant=Yes, Supplier 1=Digi-Key, Surface Mount=Yes, Technology=CMOS, Terminal Finish=Tin, Terminal Form="Gull Wing", Terminal Pitch=0.95mm, Terminal Position=DUAL, Turn-Off Delay Time=0.06us, Turn-On Delay Time=0.055us, Width=1.55mm
J1: "Conn Unshrouded Header HDR 8 POS 2.54mm Solder ST Thru-Hole Carton", Package=None, Availability=Warning, Centerline_Pitch="2.54 mm[.1 in]", Check_prices=https://www.snapeda.com/parts/102976-8/TE%20Connectivity%20AMP%20Connectors/view-part/1332152/?ref=eda, EU_RoHS_Compliance="Not Compliant", MF="TE Connectivity", MP=102976-8, Number_of_Positions=8, Price=None, Product_Type=Connector, SnapEDA_Link=https://www.snapeda.com/parts/102976-8/TE%20Connectivity%20AMP%20Connectors/view-part/1332152/?ref=snap
J2: "HEADER 1X10"
LED1: "Standard LEDs - Through Hole RGB 630/525/465nm 750/420/750mcd 60Deg   Source:  Datasheet", MANUFACTURER_NAME=Kingbright, DeviceSetName=WP154A4SUREQBFZGC, GateName_1=G$1, Height=mm, LibraryName=WP154A4SUREQBFZGC, Manufacturer_Part_Number=WP154A4SUREQBFZGC, MOUSER_PART_NUMBER=604-WP154A4SUREQBFZG, MOUSER_PRICE-STOCK=https://www.mouser.co.uk/ProductDetail/Kingbright/WP154A4SUREQBFZGC?qs=vEWui5pQpauEeiZ%252Btq6oqQ%3D%3D, SymbolName_1=WP154A4SUREQBFZGC
LED2: "Standard LEDs - SMD SMD 1206 RED   Source:  Datasheet", MANUFACTURER_NAME=Dialight, DeviceSetName=599-0210-007F, GateName_1=G$1, Height=0.9mm, LibraryName=599-0210-007F, Manufacturer_Part_Number=599-0210-007F, MOUSER_PART_NUMBER=645-599-0210-007F, MOUSER_PRICE-STOCK=https://www.mouser.co.uk/ProductDetail/Dialight/599-0210-007F?qs=gTYE2QTfZfRnv7f5dCtvhw%3D%3D, SymbolName_1=599-0210-007F
Q1: library part BTA06-600BRG, "TRIAC Standard 600V 6A Through Hole TO-220AB", Package="TO-220 STMicroelectronics", Availability=Unavailable, MF=STMicroelectronics, MP=BTA06-600BRG, Price=None, SnapEDA_Link=https://www.snapeda.com/parts/BTA06-600BRG/STMicroelectronics/view-part/107180/?ref=snap
Q2: "30V P-channel Enhancement Mode Mosfet", Manufacturer="Pan Jit", Manufacturer Part Number=PJA3409_R1_00001, Supplier Part Number 1=3757-PJA3409_R1_00001CT-ND, Category=Uncategorized, ComponentLink1Description="Manufacturer Link", ComponentLink1URL=http://www.irf.com/, DatasheetVersion=PD-9.390D, LatestRevisionDate=17-Jul-2002, LatestRevisionNote="Re-released for DXP Platform.", Note="Pin 4 not drawn and electrically connected to Pin 2.", PackageDescription="TO, Thru-Hole, Vertical, Heatsink Mounted; 3 In-Line Leads; Pitch 2.54 mm", PackageReference=TO-220AB, PackageVersion=Feb-1997, Pricing 1="1=0.49000, 10=0.36300, 100=0.20550, 500=0.13608, 1000=0.10433 (USD)", Published=8-Jun-2000, Publisher="Altium Limited", RoHS=No, Stock 1=107416, Supplier 1=Digi-Key
Q3: "NPN Ic=600mA Vceo=40V hfe=100~300 fT=300MHz P=310mW SOT-23", Case/Package=SOT-23, Clock Frequency=300MHz, Collector Base Voltage (VCBO)=75V, Collector Emitter Breakdown Voltage=40V, Collector Emitter Saturation Voltage=1V, Continuous Collector Current=600mA, Current=1A, Emitter Base Voltage (VEBO)=6V, Manufacturer=Diodes, Manufacturer Part Number=MMBT2222A-7-F, Max Operating Temperature=150°C, Max Power Dissipation=300mW, Min Operating Temperature=-55°C, Package Quantity=3000, Power Dissipation=350mW, Supplier Part Number 1=MMBT2222A-FDICT-ND, Category=BJTs, Collector Emitter Voltage (VCEO)=40V, Collector-emitter Voltage-Max=1V, ComponentLink1Description=https://datasheet.ciiva.com/8029/ds30041-8029709.pdf?src-supplier=Element14, ComponentLink1URL=https://datasheet.ciiva.com/8029/ds30041-8029709.pdf?src-supplier=Element14, ComponentLink2Description=https://datasheet.ciiva.com/11201/ds30041-11201864.pdf?src-supplier=Avnet, ComponentLink2URL=https://datasheet.ciiva.com/11201/ds30041-11201864.pdf?src-supplier=Avnet, ComponentLink3Description=https://datasheet.ciiva.com/16199/ds30041-16199045.pdf?src-supplier=Future+Electronics, ComponentLink3URL=https://datasheet.ciiva.com/16199/ds30041-16199045.pdf?src-supplier=Future+Electronics, Contact Plating=Tin,Matte, Current Rating=600mA, Designer=Roomi, Designer Email=roomi.freel@gmail.com, Element Configuration=Single, Frequency=300MHz, Gain Bandwidth Product=300MHz, Height=1mm, hFE Min=100, Lead Free="Lead Free", Length=3.05mm, Max Breakdown Voltage=40V, Max Collector Current=600mA, Mounting Technology="Surface Mount", Number of Elements=1, Packaging="Tape and Reel", Pins=3, Polarity=NPN, Pricing 1="1=0.14000, 10=0.13200, 100=0.07200, 500=0.04430, 1000=0.03021 (USD)", Radiation Hardening=No, Reach SVHC Compliant=Yes, RoHS=Yes, RoHS Compliant=Yes, Series="Automotive, AEC-Q101", Stock 1=2753666, Supplier 1=Digi-Key, Supplier 2=Mouser, Supplier Part Number 2=621-MMBT2222A-F, Termination=SMD/SMT, Transition Frequency=300MHz, Val=NPN, Voltage=40V, Voltage Rating (DC)=40V, Weight=0.000282oz, Width=1.4mm
R1 R2 R4 R5 R6 R7 R9 R11 R21 R22: Package="0805 Panasonic", Availability=Unavailable, DeviceSetName=ERJ-6RBD1652V, GateName_1=G$1, LibraryName=ERJ-6RBD1652V, MF=Panasonic, MP=ERJ-6RBD1652V, Price=None, SymbolName_1=ERJ-6RBD1652V
R3 R8: "VISHAY - CRCW2512360RJNEG - RES, THICK FILM, 360R, 5%, 0.5W, 2512   Source:  Datasheet", MANUFACTURER_NAME=Vishay, DeviceSetName=CRCW2512360RJNEG, GateName_1=G$1, Height=0.7mm, LibraryName=CRCW2512360RJNEG, Manufacturer_Part_Number=CRCW2512360RJNEG, MOUSER_PART_NUMBER=71-CRCW2512J-360-E3, MOUSER_PRICE-STOCK=https://www.mouser.com/Search/Refine.aspx?Keyword=71-CRCW2512J-360-E3, SymbolName_1=CRCW2512360RJNEG
R10 R12: library part Resistor, "General Purpose Chip Resistor", Designer=Roomi, Designer Email=roomi.freel@gmail.com
  R10: Val=47k
  R12: Val=2.2k
X1 X2 X4 X5 X6 X7 X8 X9: library part "HDR 1X2", "HEADER 1X2"
X3 X10: library part "HDR 1X3", "HEADER 1X3"

## Via types
v1: diameter 29.78/29.78 (per signal layer), hole 13.78, Top to Bottom, 76 vias
v2: diameter 29.78, hole 13.78, Top to Bottom, 46 vias
v3: diameter 32, hole 16, Top to Bottom, tented both sides, 19 vias
v4: diameter 37.65/37.65 (per signal layer), hole 21.65, Top to Bottom, 16 vias
v5: diameter 32, hole 16, Top to Bottom, 8 vias
v6: diameter 155, hole 106, Top to Bottom, 2 vias
v7: diameter 50, hole 28, Top to Bottom, tented both sides, 2 vias

## Nets (pads, with @x,y where several pads share a name; then routed paths per layer and width w, separated by ;. In a path a pad name is that pad's centre, name@x,y a point inside that pad or via, vN(x,y) a via of type N, cw(c..) or ccw(c..) an arc to the next point about the centre after c; other vN are vias at no path point)
FAN_SPD: IC1.7 R12.2 | length 967.3
  Top w15: R12.2 886.34,2306.57 1141.73,2051.18 1546.93,2051.18 1602.86,2107.11 IC1.7
GND: C2.1 C3.2 C4.1 C5.1 C6.1 C7.1 C8.1 C9.2 IC1.1 IC1.15 IC1.38 IC1.39 IC1.40 IC1.41 IC1.42 IC1.43 IC1.44 IC1.45 IC1.46 IC1.47 IC2.8 IC3.4 IC4.2 IC5.1 IC5.2 IC5.3 IC6.4 J1.1 J2.10 LED1.2 LED2.1 Q3.2 R2.1 R4.2 X1.2 X10.3 | length 4783.1
  Top w6: 3789.11,404.75 3894.11,509.75 3834.11,449.75 3889.11,394.75 3789.11,494.75
  Top w8: IC1.43 2038.56,2034.85 v1(2038.56,1980.26)
  Top w10: v2(1314.96,2122.05) 1364.09,2122.05 C6.1
  Top w15: IC5.1@699.3,1331.37 IC5.1 IC5.2 ; IC5.2@699.3,1356.96 IC5.2 ; IC5.3@699.3,1382.55 IC5.3 IC5.2
  Top w16: 2309.22,404.64 2333.29,404.64 IC2.8 2424,404.64
  Top w20: IC1.1 1811.82,2407.12 1889.33,2329.61 IC1.39 IC1.40 IC1.41 ; v1(1766.75,1814.47) 1768.62,1812.6 1768.62,1725.06 IC1.15 ; IC1.42 IC1.43 ; IC1.47 IC1.46 ; IC1.45 2256.85,2407.12 2644.35,2407.12 2725.75,2488.52 2725.75,2629.11 2781.63,2685 3196.77,2685 3252.85,2628.92 3252.85,2550.07 LED1.2 ; v2(2274.11,404.75) 2274.26,404.91 2291.94,404.91 2292.21,404.64 2309.22,404.64 ; 2309.22,401.85 2333.29,401.85 ; IC2.8 2424,404.64 2430,404.64 2460.55,374.09 2460.55,335.35 C9.2
  Top w32: IC1.40 IC1.47 ; IC1.39 IC1.46 IC1.45 IC1.44 IC1.43 ; v1(3338.19,610.63) IC3.4 3326.77,779.13 3326.77,905.51 3338.58,917.32 v2(3350.39,917.32) 3350.39,951.97 3372.83,974.41 C3.2 ; IC3.4@3346.46,764.75 3390.29,764.75 3502.96,764.75 v1(3503.94,763.78) ; v2@3352.83,919.75 v1(3389.11,919.75) ; C2.1@3844.15,604.95 3849.11,609.91 C4.1
  Bottom w6: 3879.11,404.75 3889.11,404.75
  Bottom w8: v1(2038.56,1980.26) 2078.82,1940 v1(2095.75,1940)
  Bottom w12: 3799.11,484.75 3879.11,404.75 3844.11,439.75 3884.11,479.75 3819.11,414.75
  other v1: 2326.08,79.47 2196.43,88.84 2033.95,96.68 3217.97,97.19 3832.97,97.19 3084.66,97.9 2544.31,99.08 2664.03,108.18 2799.07,107.55 2936.55,107.27 2434.74,110.1 1790.21,156.05 2093.32,168.57 2232.34,170.1 1943.32,171.68 3890.75,230 1723.05,249.83 1852.69,259.2 3035.75,335 2660.75,340 3435.75,400 2000.75,415 1773.05,439.83 3295.75,450 3435.75,500 1744.09,622.05 2268.05,679.83 2240.75,800 2152.01,864.83 2464.35,1027.35 2311.02,1047.24 2224.41,1059.06 2276.2,1102.86 2169.46,1186.44 2276.79,1214.91 2094.49,1259.84 2281.12,1277.58 2200.79,1299.21 2393.7,1413.39 2477.97,1467.19 1905.51,1503.94 1518.05,1749.83 3005.75,1810 1962.57,1954.08 3002.97,1982.19 2138.13,1987.82 2207.93,1996.84 2140.37,2075.62 2221.43,2082.39 2122.38,2140.93 3073.05,2149.83 2194.39,2152.19 2158.4,2212.98 2214.66,2255.73 1987.34,2309.75 2066.12,2323.25 3263.05,2379.83 3635.75,2380 1971.55,2386.32 2075.09,2393.06 2678.05,2639.83
  other v2: 3500.75,210 2070.75,340 2240.75,340 2370.75,345 3004.11,544.75 2785.75,750 3739.11,759.75 2554.11,909.75 2954.11,974.75 2939.11,1069.75 2769.11,1074.75 2689.11,1174.75 713.36,1249.75 753.36,1249.75 793.36,1249.75 843.36,1249.75 705,1285 793.36,1314.75 833.36,1314.75 2476.94,1337.59 2954.11,1374.75 815.55,1464.69 860.55,1509.69 3300.75,1575 915.55,1624.69 1035.43,1625.98 2719.11,1949.75 1043.36,2374.75 998.36,2659.75
IO4: IC1.26 J2.8 R11.1 | length 1544.9
  Top w8: IC1.26 2632.87,1807.12 2745,1695 J2.8 2885.75,1695 2970.75,1780 2970.75,2140 3134.83,2304.08 3254.83,2304.08 3303.02,2352.27 R11.1
IO16: IC1.27 J2.7 R6.2 | length 1275.9
  Top w8: IC1.27 2534.27,1857.12 2663.62,1857.13 2725.75,1795 J2.7 2830.75,1800 2890.75,1800 2945.75,1855 2945.75,2175 3102.42,2331.67 R6.2
IO17: IC1.28 J2.6 R5.2 | length 1340.7
  Top w8: IC1.28 2708.63,1907.11 2725.75,1890 2820.75,1890 J2.6 2885.75,1895 2913.21,1922.46 2913.21,2552.46 2942.94,2582.19 R5.2
IO18: IC1.30 J2.5 | length 495.5
  Top w20: IC1.30 2499.67,2007.12 v1(2500.02,2007.47)
  Bottom w20: v1(2500.02,2007.47) 2780.89,2007.47 2784.38,2003.98 2816.77,2003.98 J2.5
IO19: IC1.31 J2.4 | length 506.8
  Top w20: IC1.31 2490.92,2057.12 v1(2492.06,2055.97)
  Bottom w20: v1(2492.06,2055.97) 2676.72,2055.97 2715.75,2095 J2.4
IO21: IC1.33 J2.2 | length 547.3
  Top w20: IC1.33 v2(2525.75,2157.11) ; v2(2652.59,2241.84) 2705.75,2295 J2.2
  Bottom w20: v2(2525.75,2157.11) 2567.86,2157.11 v2(2652.59,2241.84)
IO22: IC1.36 J2.3 | length 572
  Top w20: IC1.36 2481.36,2307.12 v1(2482.46,2308.21)
  Bottom w20: v1(2482.46,2308.21) 2485.1,2308.21 2493.32,2300 2677.27,2300 2715.75,2261.53 2715.75,2202.62 2723.36,2195 J2.3
IO23: IC1.37 J2.1 | length 505.8
  Top w20: IC1.37 2337.12,2358.65 v1(2482.46,2358.65)
  Bottom w20: v1(2482.46,2358.65) 2518.8,2395 J2.1
NetC2_2: C2.2 C4.2 C8.2 C9.1 D4.1 D5.1 D6.1 D7.1 D8.1 D10.1 IC2.9 IC3.1 IC6.2 Q2.2 R10.2 X1.1 X3.3 X5.1 X7.1 X8.1 X9.1 | length 12687.9
  Top w20: IC3.1 3601.02,678.58 3813.09,678.58 C2.2 C4.2 ; C4.2@3918.95,674.75 C4.2@3919.11,674.91
  Top w30: IC6.2 C8.2@1055.61,1424.69 ; C9.1 2579.39,335 ; 2579.39,247.47 2579.39,335 ; IC2.9 2579.39,335
  Top w63: D8.1 3705.95,1320.2 3760.75,1375 X8.1 3840.75,1445 3877.95,1482.2 3877.95,1837.8 3833.24,1882.51 X5.1
  Top w66: 73.36,1944.75 73.36,1780.97 255.91,1598.43 ; 73.36,1947.59 73.36,2038.67 ; 100.04,2280.04 D10.1 ; X9.1 255.91,1598.43 ; D7.1 508.36,2017.82 507.89,2017.36 489.17,2017.36 486.81,2015 250.22,2015 X7.1 238.47,2015 97.03,2015 73.36,2038.67 ; Q2.2 585,2683.66 R10.2 200.75,2685 75,2559.25 75,2280.04 75,2255 73.36,2253.36 73.36,2038.67 ; C8.2@1072.18,1433.07 1413.39,1433.07 ; D5.1@3509.6,2450.24 D5.1 3513.28,2441.64 D6.1 3438.14,2263.78 3374.11,2199.75 3374.11,1709.62 ; D5.1@3509.6,2462.05 3531.28,2483.74 X3.3@3754.38,2483.74 ; D4.1 3514.62,1657.59 3508.71,1663.5 3420.23,1663.5 3374.11,1709.62 ; IC3.1 3589.09,666.65 3574.29,666.65 3574.29,651.85 3505.75,583.31 3505.75,307.59 ; X1.1@3644.11,307.59 3505.75,307.59 ; 255.91,1598.43 602.36,1598.43 748.03,1744.09 1106.3,1744.09 1415.35,1435.04 1890.75,959.65 1890.75,401.14 2044.42,247.47 2579.39,247.47 3063.99,247.47 3119.11,302.59 ; 3119.11,302.59 3124.11,307.59 3505.75,307.59 ; 3119.11,302.59 3119.11,1024.62 3374.11,1279.62 3374.11,1709.62
  Bottom w66: X5.1 3858.25,1882.51 3900.75,1925 3900.75,2425 3842.01,2483.74 X3.3
NetC6_2: C6.2 IC1.3 J1.8 R21.1 | length 3078.1
  Top w8: C6.2@1433.07,2124.2 1433.07,2234.26 1505.93,2307.11 IC1.3 1763.32,2307.12 v1(1781.75,2288.69) ; v2(2585.75,1385) 2840.75,1385 2925.75,1470 2925.75,1605 2925.05,1605.7 3199.11,1879.75 3284.11,1879.75 3309.11,1904.75 3309.11,2009.75 3289.11,2029.75 3239.15,2029.75 J1.8
  Bottom w8: v1(1781.75,2288.69) 1781.75,2054.63 2182.33,1654.06 2424.81,1654.06 2585.75,1493.11 v2(2585.75,1385)
NetD1_1: D1.1 D10.2 | length 85
  Top w30: D10.2 D1.1
NetD1_2: D1.2 D2.1 | length 85
  Top w30: D1.2 D2.1
NetD2_2: D2.2 D11.1 | length 85
  Top w30: D2.2 D11.1
NetD3_1: D3.1 D9.2 Q2.3 X6.1 | length 916.3
  Top w30: X6.1 334.37,2514.37 374.55,2554.55 D3.1 490.45,2554.55 540,2505 614.92,2505 618.7,2508.78 619.21,2508.78 622.4,2511.97 Q2.3 ; D9.2 v5(560,2340)
  Bottom w30: X6.1 470.63,2514.37 560,2425 v5(560,2340)
NetD3_2: D3.2 IC2.15 IC2.16 X6.2 | length 3612.8
  Top w30: X6.2 339.37,2435.63 365,2410 438.31,2410 440.84,2407.48 667.52,2407.48 725,2350 725,2318.31 1657.48,1385.83 2318.9,1385.83 2748.03,956.69 2748.03,816.38 2675.75,744.1 ; D3.2@438.31,2404.95 D3.2 ; IC2.15 2665.2,704.64 2675.75,715.19 2675.75,744.1 ; IC2.16 2665.2,754.64 2675.75,744.1
NetD4_2: D4.2 IC2.14 X5.2 | length 2407.4
  Top w35: IC2.14 2579.74,655 2700.03,655 2725.03,680 v4(2725.75,680)
  Top w50: v4(3513.52,1940.1) 3534.66,1961.25 X5.2 ; v4@3514.11,1939.75 3514.11,1802.78 D4.2
  Bottom w35: v4@2726.47,680 2835.75,680 2992.13,836.38 2992.13,956.69 3153.54,1118.11 3492.13,1118.11 3523.62,1149.61 3523.62,1929.28 3513.52,1939.39 v4(3513.52,1940.1)
NetD5_2: D5.2 IC2.10 X3.2 | length 3873.1
  Top w20: IC2.10 2634.21,454.64 2658.83,430.03 2719.7,369.16 v4(2936,369.16)
  Top w32: D5.2 3579.18,2594.92 3645.39,2661.13 3897.73,2661.13 3943.13,2615.73 3943.13,2435.54 3912.57,2405 X3.2
  Bottom w20: v4(2936,369.16) 2995.53,369.16 3141.73,515.37 3141.73,842.52 3263.78,964.57 3578.74,964.57 3677.17,1062.99 3677.17,2371.42 3710.75,2405 X3.2
NetD6_2: D6.2 IC2.11 X3.1 | length 2976.2
  Top w20: IC2.11 2703,504.64 2739.11,468.53 v4(2951.91,468.53)
  Top w32: D6.2 3594.49,2114.17 3621.23,2140.91 v4(3621.23,2169.06) 3742.95,2290.78 3742.95,2317.65 3751.55,2326.26 X3.1
  Bottom w20: v4(2951.91,468.53) 3009.03,468.53 3102.36,561.87 3102.36,885.83 3220.47,1003.94 3551.18,1003.94 3640.75,1093.5 3640.75,2144.77 3621.23,2164.29 v4(3621.23,2169.06)
NetD7_2: D7.2 IC2.13 X7.2 | length 3711.2
  Top w20: IC2.13 2789.67,604.64 2945.25,760.22 v4(2945.25,915.3)
  Top w30: D7.2@508.36,1900.85 1063.71,1900.85 1641.73,1322.83 2110.24,1322.83 2449.19,983.88 2570.32,983.88 2571.76,982.44 2577.17,982.44 v4(2578.64,980.97)
  Top w75: X7.2@244.34,1919.36 262.85,1900.85 428.99,1900.85
  Top w78.4: 428.99,1900.85 444.89,1884.95 D7.2
  Bottom w20: v4(2578.64,980.97) 2581.55,983.88 2876.67,983.88 v4(2945.25,915.3)
NetD8_2: D8.2 IC2.12 X8.2 | length 1959.4
  Top w35: IC2.12 2855.39,554.64 v7(3015.75,715)
  Top w40: D8.2 3635.55,1469.8 3689.49,1523.74 X8.2
  Bottom w35: v7(3015.75,715) 3055.12,754.37 3055.12,937.01 3173.23,1055.12 3515.75,1055.12 3590.75,1130.12 3590.75,1469 v7(3589.75,1470)
NetD9_1: D9.1 D12.2 | length 85
  Top w30: D12.2 D9.1
NetD11_2: D11.2 D12.1 | length 85
  Top w30: D11.2 D12.1
NetIC1_8: IC1.8 R1.2 X10.2 | length 2613.8
  Top w12: IC1.8 1711.31,2057.12 1883.32,1885.1 2090.21,1885.1 v4(2140.45,1834.87)
  Top w20: v4(3468.98,1170.59) 3536.1,1170.59 R1.2 ; R1.2@3534.96,1166.02 3593.82,1166.02 3637.8,1122.05 3637.8,1015.75 3699.8,953.74 X10.2
  Bottom w12: v4(2140.45,1834.87) 2305.87,1834.87 2967.52,1173.23 v4@3460.63,1173.23
NetIC1_9: IC1.9 IC2.7 | length 2424.1
  Top w20: v5(1326.77,1948.82) 1386.87,2008.91 1386.87,2009.32 1664.1,2009.32 IC1.9 ; v4(2020.8,571.36) 2137.52,454.64 IC2.7
  Bottom w20: v5(1326.77,1948.82) 1326.77,1523.62 2020.8,829.6 v4(2020.8,571.36)
NetIC1_10: IC1.10 IC2.6 | length 2255
  Top w20: v5(1392.51,1916.57) 1390.21,1918.87 1390.21,1927.35 1387.6,1929.96 1387.6,1940.73 1404,1957.12 IC1.10 ; v4(2075.41,602.31) 2173.07,504.64 IC2.6
  Bottom w20: v5(1392.51,1916.57) 1392.51,1913.57 1374.02,1895.08 1374.02,1539.37 2062.99,850.39 2062.99,618.76 2075.41,606.34 v4(2075.41,602.31)
NetIC1_11: IC1.11 IC2.4 | length 2018.4
  Top w20: v5(1470.02,1911.96) 1470.68,1911.29 1662.13,1911.29 IC1.11 ; v4(2135.05,667.9) 2198.31,604.64 IC2.4
  Bottom w20: v5(1470.02,1911.96) 1417.32,1859.26 1417.32,1559.56 2110.24,866.64 2110.24,692.74 v4(2135.05,667.9)
NetIC1_13: IC1.13 IC2.5 | length 1733.3
  Top w20: v3(1575.75,1705) 1575.75,1780 1602.86,1807.11 IC1.13 ; v3(2230.75,555) 2240.75,555 2241.1,554.64 IC2.5
  Bottom w20: v3(1575.75,1705) 1575.75,1514.8 2185.04,905.51 2185.04,600.71 v3(2230.75,555)
NetIC1_14: IC1.14 IC2.1 IC2.2 | length 1451.3
  Top w20: v4(1664.11,1619.75) 1664.11,1752.02 1662.65,1753.48 IC1.14 ; v4(2251.97,905.51) 2365.85,791.63 IC2.1 2320.39,754.64 2310.75,745 2310.75,715 2321.1,704.64 IC2.2
  Bottom w20: v4(1664.11,1619.75) 1664.11,1493.37 v4@2257.32,900.16
NetIC1_16: IC1.16 IC2.3 | length 1435.4
  Top w10: IC2.3 2445.39,654.64 2459.35,668.61 2459.35,800.49 v4(2456.69,803.15)
  Top w20: IC1.16 v4(1826.75,1625.62)
  Bottom w20: v4(1826.75,1625.62) 1821.75,1620.62 1821.75,1402.66 2263.78,960.63 2299.21,960.63 v4(2456.69,803.15)
NetIC1_23: IC1.23 IC6.3 R2.2 | length 1921.6
  Top w10: R2.2 978.91,1548.93 978.91,1472.44 IC6.3@977.91,1471.44 ; R2.2@978.91,1549.69 v1(1045.55,1549.69) ; v5(1244.09,1960.63) 1244.09,1956.69 1657.48,1543.31 1842.52,1543.31 1893.97,1594.75 2105.09,1594.75 2175.94,1665.6 IC1.23
  Bottom w10: v1(1045.55,1549.69) 1163.86,1549.69 1224.41,1610.24 1224.41,1940.94 v5(1244.09,1960.63)
NetIC1_24: IC1.24 R4.1 | length 339.3
  Top w20: R4.1 2147.77,1512.19 2226.59,1591.01 2226.59,1717.1 IC1.24
NetIC1_25: IC1.25 J1.7 R22.1 | length 1239.2
  Top w8: IC1.25@2339.11,1753.58 IC1.25 2623.63,1757.11 2735.75,1645 2899.35,1645 3184.39,1930.03 J1.7
  Top w10: R22.1 IC1.25@2339.11,1753.58
NetIC1_29: IC1.29 R9.2 | length 2605.3
  Top w10: R9.2 1627.52,930.75 v2(1687.52,990.75) ; v1(1923.72,1792.51) 2055.76,1792.51 2056.22,1792.05 2187.98,1792.05 2203.8,1807.86 2203.8,1859.44 2294.11,1949.75 2328.22,1949.75 IC1.29
  Bottom w10: v2(1687.52,990.75) 1687.52,1064.45 1285.45,1466.52 1285.45,2006.09 1344.11,2064.75 1619.62,2064.75 1748.4,1935.97 1891.87,1792.51 v1(1923.72,1792.51)
NetIC1_34: IC1.34 J1.2 | length 1467.5
  Top w8: IC1.34 2402.29,2207.12 v1(2416,2193.41)
  Bottom w8: v1(2416,2193.41) 2417.61,2191.8 2417.61,1778.14 2685.76,1509.99 2765.71,1430.03 J1.2
NetIC1_35: IC1.35 J1.3 | length 1545.2
  Top w8: IC1.35 2467.34,2257.12 v1(2468.95,2258.73)
  Bottom w8: v1(2468.95,2258.73) 2499.35,2258.73 2507.81,2250.26 2507.81,2216.48 2492.57,2201.25 2460.49,2201.25 2450.37,2191.13 2450.37,1959.75 2450.37,1845.38 2701.86,1593.89 2701.86,1590.03 2708.89,1583 2712.75,1583 2750.75,1545 3210.83,1545 3225.8,1530.03 J1.3
NetIC4_1: IC4.1 R9.1 | length 111
  Top w23.62: IC4.1@1518.72,804.55 R9.1@1626.32,804.55
  Top w40: IC4.1 IC4.1@1518.72,804.55 ; R9.1@1626.32,804.55 R9.1
NetIC4_4: IC4.4 Q1.3 R3.2 | length 974
  Top w63: Q1.3 655.12,690.55 881.89,917.32 1074.8,917.32 1163.23,1005.75 IC4.4 1231.76,1005.75 1322.83,1096.82 R3.2@1322.83,1182.09
NetIC4_6: IC4.6 R8.2 | length 278.8
  Top w22: IC4.6 1327.52,805.75 1391.01,742.26 1391.01,665.37 R8.2@1392.52,663.86
NetIC5_4: IC5.4 IC6.5 | length 180.5
  Top w15: IC5.4 753.27,1408.14 774.13,1387.28 IC6.5
NetIC5_5: IC5.5 IC5.6 IC5.7 IC5.8 IC5.D IC5.D. X9.2 | length 141.6
  Top w8: IC5.6 611.49,1382.53 IC5.D
  Top w12: IC5.8@574.2,1331.35 IC5.8 IC5.7 ; IC5.7@574.2,1356.94 IC5.7 ; IC5.5@574.2,1408.12 IC5.5 IC5.6 IC5.7
  other v2: 500,1210 460,1260 460,1310 530,1345 480,1370 495,1415 545,1450 470,1460
  other v3: 170.35,1218.58 103.12,1227.64 75.35,1253.58 68.19,1333.94 120.35,1338.58 165.35,1338.58 70.87,1401.57 135.35,1418.58 85.35,1473.58 362.2,1523.62 575,1535 73.19,1543.94 68.19,1633.94 280,1670 66.93,1681.1 354.33,1716.54 270,1725
NetLED1_1: LED1.1 R11.2 | length 182
  Top w20: LED1.1@3302.42,2589 3350.96,2540.46 R11.2
NetLED1_3: LED1.3 R6.1 | length 194.1
  Top w8: R6.1 3202.42,2430.5 LED1.3@3202.42,2589
NetLED1_4: LED1.4 R5.1 | length 156.5
  Top w8: R5.1 3110.17,2507.39 LED1.4
NetLED2_2: LED2.2 R7.1 | length 205.2
  Top w10: LED2.2 3413.09,49.75 3481.71,49.75 3545.18,113.22 3549.12,113.22 3571.71,135.81 R7.1
NetQ1_1: Q1.1 R3.1 X2.1 | length 1240.7
  Top w63: X2.1 269.2,520 293.18,543.98 293.18,549.09 842.52,1098.43 1066.4,1098.43 1086.61,1118.63 R3.1 ; Q1.1 602.36,393.7 610.24,385.83
NetQ1_2: Q1.2 R8.1 X4.1 | length 1645.3
  Top w63: Q1.2 712.6,590.55 854.33,732.28 1082.68,732.28 1208.66,606.3 1208.66,488.19 1275.59,421.26 R8.1
  Bottom w63: X4.1 399.06,915.91 456.69,858.27 456.69,663.31 530,590 Q1.2@600,590
NetQ2_1: Q2.1 Q3.3 R10.1 | length 296.4
  Top w15: R10.1 666.34,2641.73 659.8,2635.2 Q2.1 710,2605 778.74,2536.26 Q3.3
NetQ3_1: Q3.1 R12.1 | length 80.4
  Top w15: R12.1 803.66,2439.8 Q3.1
NetX2_2: X2.2 X4.2 | length 638
  Bottom w70: X4.2 162.05,760 101.13,699.08 101.13,419.08 156.12,364.1 X2.2
VCC: C3.1 C5.2 C7.2 IC1.2 IC3.3 J1.6 J2.9 R1.1 R7.2 R21.2 R22.2 X10.1 | length 5895.6
  Top w30: v5(1173.23,2003.94) 1173.23,1948.82 1677.17,1444.88 2204.72,1444.88 2272.2,1512.35 R22.2 2403.1,1512.35 2485.75,1595 J2.9 J2.9@2836.43,1595 ; v5(1307.09,2232.28) 1310.33,2232.28 1318.21,2240.16 R21.2 1368.11,2281.5 1385.83,2299.21 1417.32,2299.21 1437.01,2318.9 1437.01,2348.09 1446.03,2357.11 IC1.2 ; v5(3413.39,1208.66) 3413.39,1145.67 3438.98,1120.08 3438.98,985.04 C3.1 3500,984.25 v2(3566.93,917.32) 3566.93,866.97 3576.02,857.87 IC3.3 ; C5.2@3451.57,1078.74 3533.46,1078.74 R1.1 ; R7.2 3649.11,142.35 3651.71,139.75 v2(3724.11,139.75)
  Bottom w30: v5(1173.23,2003.94) 1173.23,2102.36 1303.15,2232.28 v5(1307.09,2232.28) ; J2.9 2949.33,1595 3184.37,1830.03 J1.6 3307.76,1830.03 3413.39,1724.41 v5(3413.39,1208.66) ; v2(3566.93,917.32) 3566.93,882.62 3574.54,875 X10.1 3841.54,875 3935.75,780.79 3935.75,190 3885.5,139.75 v2(3724.11,139.75)
pads on no net: IC1.4 IC1.5 IC1.6 IC1.12 IC1.17 IC1.18 IC1.19 IC1.20 IC1.21 IC1.22 IC1.32 IC4.3 IC4.5 IC6.1 J1.4 J1.5
copper on no net:
  other v6: 580,90 580,1090

## Polygon pours and split planes (outlines as drawn)
NetIC5_5 on Bottom "Top-No Net" (solid, pour order 17): 654.2,1200.79 654.2,2015.79 42.56,2015.79 42.56,1200.79
GND on Bottom "Polygon_1_Net_GND" (solid, remove dead copper, pour order 1): 687.36,2752.74 1357.92,2752.74 1360.19,2750.48 1360.19,2489.85 1359.02,2491.01 2572.3,2491.01 2568.2,2495.33 2568.2,2750.12 2570.15,2751.91 3996.73,2751.91 3998.57,2750.08 3998.57,0.01 1496.06,0.01 1496.06,1216.54 687.36,1216.54
GND on Top "Polygon_2_Net_GND" (solid, remove dead copper, pour order 0): 877.95,1228.35 937.01,1287.4 1173.23,1287.4 1185.04,1299.21 1185.04,1330.71 1208.66,1355.35 1500,1355.35 1500,10 3993.92,10 3993.92,2755.91 2582.68,2755.91 2582.68,2480.31 1353.13,2480.31 1353.13,2767.37 692.91,2761.77 692.91,1228.35
NetIC5_5 on Top "Top-No Net" (solid, pour order 15): 613.25,1171.07 613.25,1741.07 6.61,1741.07 6.61,1171.07
NetQ1_1 on Top "Top-NetQ1_1" (solid, remove dead copper, pour order 49): 58.35,719.68 63.35,724.68 848.35,724.68 848.35,59.68 43.35,59.68 8.35,94.68 8.35,719.68 3.35,724.68 68.35,724.68